# EAGLE board CT_schematic (EAGLE 7.6.0)

Size 100 x 80 mm. Coordinates in mm from the lower left corner, seen from the top.
Outline: 0,0 100,0 100,80 0,80 0,0
Copper layers (1*16): Top 0.035mm / dielectric 1.5mm / Bottom 0.035mm
Design rules "default": minimum track width 10mil, minimum drill 24mil, track to track 8mil, track to pad 8mil, pad to pad 8mil, via to via 8mil, smd to smd 8mil, copper to edge 40mil, drill to drill 8mil, minimum pad ring 10mil, minimum via ring 8mil, stop-mask expansion 4mil, vias tented up to drill 0mil, thermal gap 10mil

## Footprints (pad centres in the part's own frame; a part is rotated, then mirrored left to right if it is on the bottom)
C0603 = smd 0.8 x 0.8: 1 -0.762,0; 2 0.762,0
C0402 = smd 0.5 x 0.5: 1 -0.508,0; 2 0.508,0
C0805 = smd 1.2 x 1.3: 1 -1.016,0; 2 1.016,0
C1210 = smd 1.2 x 2.5: 1 -1.524,0; 2 1.524,0
EXV-9H = smd 3.505 x 1.676: 1 -2.857,0; 2 2.857,0
L0603 = smd 0.8 x 0.8: 1 -0.762,0; 2 0.762,0
PJ-037B_PACKAGE = drill 3.7 square: 1 12,0 | drill 3.2 square: 2 6,0
R0603 = smd 0.8 x 0.8: 1 -0.762,0; 2 0.762,0
TFBGA64 = smd 0.35 x 0.35: A1 -1.75,1.75; A2 -1.25,1.75; A3 -0.75,1.75; A4 -0.25,1.75; A5 0.25,1.75; A6 0.75,1.75; A7 1.25,1.75; A8 1.75,1.75; B1 -1.75,1.25; B2 -1.25,1.25; B3 -0.75,1.25; B4 -0.25,1.25; B5 0.25,1.25; B6 0.75,1.25; B7 1.25,1.25; B8 1.75,1.25; C1 -1.75,0.75; C2 -1.25,0.75; C3 -0.75,0.75; C4 -0.25,0.75; C5 0.25,0.75; C6 0.75,0.75; C7 1.25,0.75; C8 1.75,0.75; D1 -1.75,0.25; D2 -1.25,0.25; D3 -0.75,0.25; D4 -0.25,0.25; D5 0.25,0.25; D6 0.75,0.25; D7 1.25,0.25; D8 1.75,0.25; E1 -1.75,-0.25; E2 -1.25,-0.25; E3 -0.75,-0.25; E4 -0.25,-0.25; E5 0.25,-0.25; E6 0.75,-0.25; E7 1.25,-0.25; E8 1.75,-0.25; F1 -1.75,-0.75; F2 -1.25,-0.75; F3 -0.75,-0.75; F4 -0.25,-0.75; F5 0.25,-0.75; F6 0.75,-0.75; F7 1.25,-0.75; F8 1.75,-0.75; G1 -1.75,-1.25; G2 -1.25,-1.25; G3 -0.75,-1.25; G4 -0.25,-1.25; G5 0.25,-1.25; G6 0.75,-1.25; G7 1.25,-1.25; G8 1.75,-1.25; H1 -1.75,-1.75; H2 -1.25,-1.75; H3 -0.75,-1.75; H4 -0.25,-1.75; H5 0.25,-1.75; H6 0.75,-1.75; H7 1.25,-1.75; H8 1.75,-1.75
ESP8266-12E = smd 2 x 1.2: 1 -7.5,7; 2 -7.5,5; 3 -7.5,3; 4 -7.5,1; 5 -7.5,-1; 6 -7.5,-3; 7 -7.5,-5; 8 -7.5,-7; 15 7.5,-7; 16 7.5,-5; 17 7.5,-3; 18 7.5,-1; 19 7.5,1; 20 7.5,3; 21 7.5,5; 22 7.5,7 | smd 1.1 x 1.7: 9 -5,-8.5; 10 -3,-8.5; 11 -1,-8.5; 12 1,-8.5; 13 3,-8.5; 14 5,-8.5
ETRX3587 = smd 1 x 1.4: 1 0,0; 2 1.27,0; 3 2.54,0; 4 3.81,0; 5 5.08,0; 6 6.35,0; 7 7.62,0; 8 8.89,0; 9 10.16,0; 10 11.43,0; 11 12.7,0; 12 13.97,0; 13 15.24,0; 14 16.51,0; 15 17.78,0; 16 19.05,0; 17 20.32,0; 18 21.59,0; 19 22.86,0; 20 22.86,18.8; 21 21.59,18.8; 22 20.32,18.8; 23 19.05,18.8; 24 17.78,18.8; 25 16.51,18.8; 26 15.24,18.8; 27 13.97,18.8; 28 12.7,18.8; 29 11.43,18.8; 30 10.16,18.8; 31 8.89,18.8; 32 7.62,18.8; 33 6.35,18.8
SAMTEC_FTSH-105-01-L-DV-K = smd 0.762 x 2.794: 1 -2.54,-2.032; 2 -2.54,2.032; 3 -1.27,-2.032; 4 -1.27,2.032; 5 0,-2.032; 6 0,2.032; 7 1.27,-2.032; 8 1.27,2.032; 9 2.54,-2.032; 10 2.54,2.032
LGA-12 = smd 0.35 x 0.3: 1 -0.8,0.75; 2 -0.8,0.25; 3 -0.8,-0.25; 4 -0.8,-0.75; 7 0.8,-0.75; 8 0.8,-0.25; 9 0.8,0.25; 10 0.8,0.75 | smd 0.3 x 0.35: 5 -0.25,-0.8; 6 0.25,-0.8; 11 0.25,0.8; 12 -0.25,0.8
ABS07-32.768KHZ-7-T = smd 1.1 x 2.4: 1 -2.5,0; 2 0,0
ABLS-25.000MHZ-B2F-T = smd 5.6 x 2.8: 1 -3.81,0; 2 5.69,0
WSON-8 = smd 0.3 x 0.6: 1 -0.75,0; 2 0.05,0; 3 0.85,0; 4 1.65,0; 5 1.65,3.8; 6 0.85,3.8; 7 0.05,3.8; 8 -0.75,3.8 | smd 3 x 2.6: PAD 0.45,1.9
SON-6 = smd 0.55 x 0.3: 1 -0.355,0.5 | smd 0.52 x 0.3: 2 -0.37,0; 3 -0.37,-0.5; 4 0.37,-0.5; 5 0.37,0; 6 0.37,0.5
SW_4-1437565-2 = smd 1.4 x 2.1: 1 -2.23,4.55; 2 -2.23,-4.55; 3 2.23,4.55; 4 2.23,-4.55
LGM67K-G1J2-24-Z = smd 0.8 x 1.4: A -2,0; C 0,0
NC7SZ125M5X = smd 1.3 x 0.7: 1 -1.3,0.95; 2 -1.3,0; 3 -1.3,-0.95; 4 1.3,-0.95; 5 1.3,0.95

## Placement (x,y rotation side)
C1  1e-06  [C0603]  -68.58,71.12 0 top  (outside the outline)
C2  1e-07  [C0603]  -72.39,71.12 0 top  (outside the outline)
C3  1e-07  [C0603]  -76.2,71.12 0 top  (outside the outline)
C4  1e-07  [C0603]  -15.24,76.2 0 top  (outside the outline)
C5  1e-07  [C0603]  -19.05,76.2 0 top  (outside the outline)
C6  4.7e-06  [C0603]  -64.77,71.12 0 top  (outside the outline)
C7  1e-07  [C0603]  -22.86,76.2 0 top  (outside the outline)
C8  1e-08  [C0603]  -26.67,76.2 0 top  (outside the outline)
C9  1e-06  [C0603]  -30.48,76.2 0 top  (outside the outline)
C10  1e-11  [C0402]  -76.2,76.2 0 top  (outside the outline)
C11  1e-11  [C0402]  -15.24,81.28 0 top  (outside the outline)
C12  1e-11  [C0402]  -19.05,81.28 0 top  (outside the outline)
C13  1e-11  [C0402]  -22.86,81.28 0 top  (outside the outline)
C14  1e-07  [C0402]  -26.67,81.28 0 top  (outside the outline)
C15  1e-05  [C0805]  -40.64,64.77 0 top  (outside the outline)
C16  1e-07  [C0402]  -30.48,81.28 0 top  (outside the outline)
C17  1e-07  [C0402]  -34.29,81.28 0 top  (outside the outline)
C18  1e-05  [C0805]  -45.72,64.77 0 top  (outside the outline)
C19  1e-07  [C0402]  -38.1,81.28 0 top  (outside the outline)
C20  1e-07  [C0402]  -41.91,81.28 0 top  (outside the outline)
C21  1e-08  [C0402]  -45.72,81.28 0 top  (outside the outline)
C22  1e-05  [C1210]  -69.85,58.42 0 top  (outside the outline)
C23  1e-05  [C1210]  -76.2,58.42 0 top  (outside the outline)
C24  1e-07  [C0402]  -49.53,81.28 0 top  (outside the outline)
C25  0.0001  [EXV-9H]  -50.8,49.53 0 top  (outside the outline)
C26  0.0001  [EXV-9H]  -62.23,49.53 0 top  (outside the outline)
C27  1e-08  [C0402]  -53.34,81.28 0 top  (outside the outline)
C28  1e-08  [C0402]  -57.15,81.28 0 top  (outside the outline)
C29  1e-08  [C0402]  -60.96,81.28 0 top  (outside the outline)
C30  1e-08  [C0402]  -64.77,81.28 0 top  (outside the outline)
F1  240.0  [L0603]  -34.29,76.2 0 top  (outside the outline)
J1  PJ-037B  [PJ-037B_PACKAGE]  -57.15,38.1 0 top  (outside the outline)
R2  1000.0  [R0603]  -38.1,76.2 0 top  (outside the outline)
R4  4700.0  [R0603]  -41.91,76.2 0 top  (outside the outline)
R5  4700.0  [R0603]  -45.72,76.2 0 top  (outside the outline)
R6  4700.0  [R0603]  -49.53,76.2 0 top  (outside the outline)
R7  2200.0  [R0603]  -53.34,76.2 0 top  (outside the outline)
R8  2200.0  [R0603]  -57.15,76.2 0 top  (outside the outline)
R9  10000.0  [R0603]  -72.39,64.77 0 top  (outside the outline)
R10  10000.0  [R0603]  -77.47,64.77 0 top  (outside the outline)
R11  10000.0  [R0603]  -15.24,71.12 0 top  (outside the outline)
R12  10000.0  [R0603]  -20.32,71.12 0 top  (outside the outline)
R13  10000.0  [R0603]  -25.4,71.12 0 top  (outside the outline)
R14  10000.0  [R0603]  -30.48,71.12 0 top  (outside the outline)
R15  10000.0  [R0603]  -35.56,71.12 0 top  (outside the outline)
R16  10000.0  [R0603]  -40.64,71.12 0 top  (outside the outline)
R17  10000.0  [R0603]  -45.72,71.12 0 top  (outside the outline)
R18  5.0  [R0603]  -60.96,76.2 0 top  (outside the outline)
R19  10000.0  [R0603]  -50.8,71.12 0 top  (outside the outline)
R20  100000.0  [R0603]  -57.15,64.77 0 top  (outside the outline)
R21  2231.0  [R0603]  -64.77,76.2 0 top  (outside the outline)
R22  1000.0  [R0603]  -68.58,76.2 0 top  (outside the outline)
R23  10000.0  [R0603]  -55.88,71.12 0 top  (outside the outline)
R24  10000.0  [R0603]  -60.96,71.12 0 top  (outside the outline)
R25  9100.0  [R0603]  -72.39,76.2 0 top  (outside the outline)
R26  680000.0  [R0603]  -62.23,64.77 0 top  (outside the outline)
R27  120000.0  [R0603]  -67.31,64.77 0 top  (outside the outline)
U1  stm32f103r8h7  [TFBGA64]  -22.86,49.53 0 top  (outside the outline)
U2  ESP8266-12E  [ESP8266-12E]  -21.59,12.7 0 top  (outside the outline)
U3  ETRX3587  [ETRX3587]  -67.31,1.27 0 top  (outside the outline)
U4  FTSH-105-01-L-DV-K  [SAMTEC_FTSH-105-01-L-DV-K]  -35.56,38.1 0 top  (outside the outline)
U5  LIS2HH12TR  [LGA-12]  -52.07,64.77 0 top  (outside the outline)
U6  ABS07-32.768KHZ-7-T  [ABS07-32.768KHZ-7-T]  -49.53,58.42 0 top  (outside the outline)
U7  ABLS-25.000MHZ-B2F-T  [ABLS-25.000MHZ-B2F-T]  -26.67,58.42 0 top  (outside the outline)
U8  LP3878SDX-ADJ/NOPB  [WSON-8]  -43.18,48.26 0 top  (outside the outline)
U9  TPS3895ADRYR  [SON-6]  -67.31,80.01 0 top  (outside the outline)
U10  4-1437565-2  [SW_4-1437565-2]  -73.66,36.83 0 top  (outside the outline)
U11  Q65110A2395  [LGM67K-G1J2-24-Z]  -58.42,58.42 0 top  (outside the outline)
U12  nc7sz125m5x  [NC7SZ125M5X]  -15.24,64.77 0 top  (outside the outline)
U13  nc7sz125m5x  [NC7SZ125M5X]  -21.59,64.77 0 top  (outside the outline)
U14  nc7sz125m5x  [NC7SZ125M5X]  -27.94,64.77 0 top  (outside the outline)
U15  nc7sz125m5x  [NC7SZ125M5X]  -34.29,64.77 0 top  (outside the outline)

## Library data of the parts
C1-C30 F1 J1 R2 R4-R27 U1-U15 = circuit_tree

## Nets
CLK_CRYSTAL_U1_A1: C10.1 U1.A1 U6.1
CLK_CRYSTAL_U1_B1: C11.1 U1.B1 U6.2
CLK_CRYSTAL_U1_C1: C12.1 U1.C1 U7.1
CLK_CRYSTAL_U1_D1: C13.1 U1.D1 U7.2
GND: C1.2 C2.2 C3.2 C4.2 C5.2 C6.2 C7.2 C8.2 C9.2 C10.2 C11.2 C12.2 C13.2 C14.2 C15.2 C16.2 C17.2 C18.2 C19.2 C20.2 C21.2 C22.2 C23.2 C24.2 C25.2 C26.2 C27.2 C28.2 C29.2 C30.2 J1.2 R2.2 R9.2 R12.2 R13.2 R17.2 R18.2 R22.2 R25.2 R27.2 U1.C2 U1.D4 U1.D5 U1.D6 U1.F1 U2.15 U3.1 U3.13 U3.19 U3.20 U3.31 U3.33 U4.3 U4.5 U5.5 U5.6 U5.7 U5.8 U8.3 U8.PAD U9.2 U11.C U12.2 U12.3 U13.1 U13.3 U14.1 U14.3 U15.1 U15.3
NET_U1_A3: R8.1 U1.A3 U5.4
NET_U1_B3: R7.1 U1.B3 U5.1
NET_U1_B4: R9.1 U1.B4
NET_U1_E1: R6.1 U1.E1 U15.4
NET_U1_H1: C8.1 C9.1 F1.1 U1.G1 U1.H1
NET_U1_H7: U11.A
NET_U1_H8: U10.3 U10.4
NET_U2_1: R4.1 U2.1 U13.4
NET_U2_3: R10.1 U2.3
NET_U2_18: R11.1 U2.18
NET_U3_7: R5.1 U3.7 U14.4
NET_U3_21: R13.1 U3.21
NET_U4_2: R16.1 U4.2
NET_U4_4: R17.1 U4.4
NET_U4_9: R18.1 U4.9
NET_U5_2: R19.1 U5.2
NET_U8_1: C21.1 U8.1
NET_U8_6: R21.2 R22.1 U8.6
NET_U8_8: R20.1 U8.8
NET_U9_1: R24.1 R25.1 U9.1
NET_U9_3: R26.2 R27.1 U9.3
NET_U9_4: R23.1 U9.4 U12.4 U13.2 U14.2 U15.2
NET_U10_1: R2.1 U10.1 U10.2
PROC_SPI1_MISO: U1.A4 U2.6
PROC_SPI1_MOSI: U1.C4 U2.7
PROC_SPI1_NSS: R12.1 U1.H3 U2.16
PROC_SPI1_SCK: U1.F4 U2.5
PROC_SYS_JTDI: R15.1 U1.A6 U4.8
PROC_SYS_JTDO_TRACESWO: U1.A5 U4.6
PROC_USART1_CTS: U1.C8 U3.8
PROC_USART1_RTS: U1.B8 U3.6
PROC_USART1_RX: U1.C3 U3.17
PROC_USART1_TX: U1.C7 U3.18
RST_OUT_U4_JTAG_RST_B: R14.1 U4.10 U12.1
VCC_S1_12V1: C22.1 C25.1 C26.1 J1.1 R20.2 U8.4
VCC_TIER1_3V3: C1.1 C2.1 C3.1 C4.1 C5.1 C6.1 C7.1 C14.1 C15.1 C16.1 C17.1 C18.1 C19.1 C20.1 C23.1 C24.1 C27.1 C28.1 C29.1 C30.1 F1.2 R4.2 R5.2 R6.2 R7.2 R8.2 R10.2 R11.2 R14.2 R15.2 R16.2 R19.2 R21.1 R23.2 R24.2 R26.1 U1.B2 U1.D2 U1.E4 U1.E5 U1.E6 U2.8 U3.32 U4.1 U5.9 U5.10 U8.5 U9.6 U12.5 U13.5 U14.5 U15.5

## Tracks (layer width: path | path; a pad name or v marks a point on that pad's centre or on a via)
CLK_CRYSTAL_U1_A1  (2 unrouted)
CLK_CRYSTAL_U1_B1  (2 unrouted)
CLK_CRYSTAL_U1_C1  (2 unrouted)
CLK_CRYSTAL_U1_D1  (2 unrouted)
GND  (69 unrouted)
NET_U1_A3  (2 unrouted)
NET_U1_B3  (2 unrouted)
NET_U1_B4  (1 unrouted)
NET_U1_E1  (2 unrouted)
NET_U1_H1  (4 unrouted)
NET_U1_H8  (1 unrouted)
NET_U2_1  (2 unrouted)
NET_U2_3  (1 unrouted)
NET_U2_18  (1 unrouted)
NET_U3_7  (2 unrouted)
NET_U3_21  (1 unrouted)
NET_U4_2  (1 unrouted)
NET_U4_4  (1 unrouted)
NET_U4_9  (1 unrouted)
NET_U5_2  (1 unrouted)
NET_U8_1  (1 unrouted)
NET_U8_6  (2 unrouted)
NET_U8_8  (1 unrouted)
NET_U9_1  (2 unrouted)
NET_U9_3  (2 unrouted)
NET_U9_4  (5 unrouted)
NET_U10_1  (2 unrouted)
PROC_SPI1_MISO  (1 unrouted)
PROC_SPI1_MOSI  (1 unrouted)
PROC_SPI1_NSS  (2 unrouted)
PROC_SPI1_SCK  (1 unrouted)
PROC_SYS_JTDI  (2 unrouted)
PROC_SYS_JTDO_TRACESWO  (1 unrouted)
PROC_USART1_CTS  (1 unrouted)
PROC_USART1_RTS  (1 unrouted)
PROC_USART1_RX  (1 unrouted)
PROC_USART1_TX  (1 unrouted)
RST_OUT_U4_JTAG_RST_B  (2 unrouted)
VCC_S1_12V1  (5 unrouted)
VCC_TIER1_3V3  (51 unrouted)